# EAGLE board shematic (EAGLE 6.4)
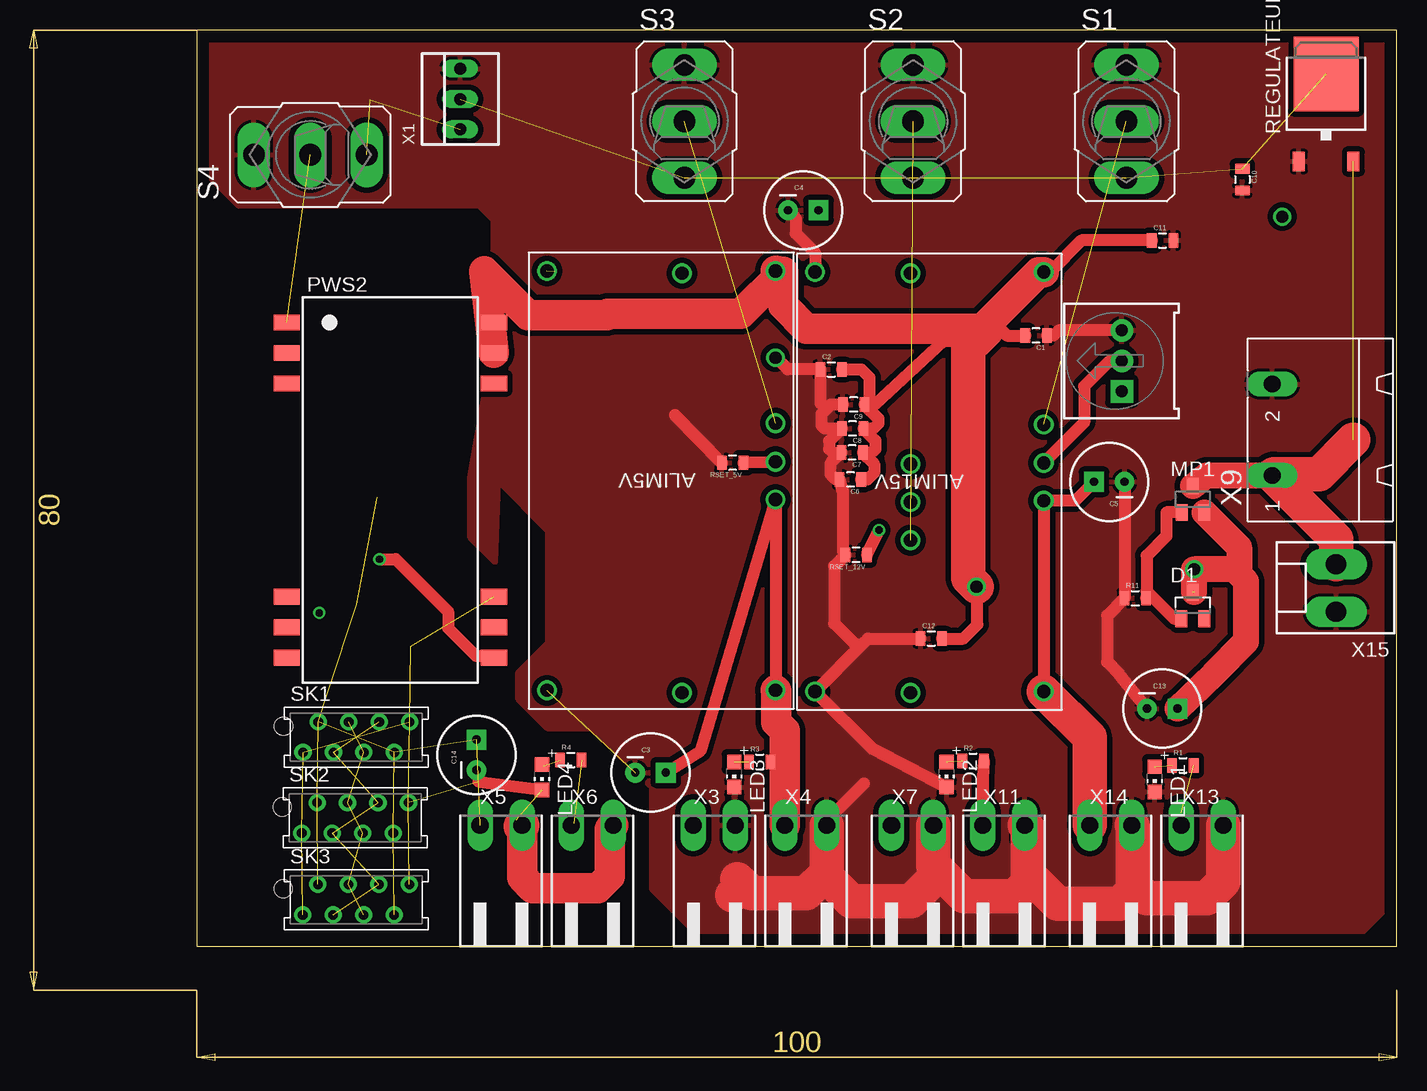
[diagram p0: board, top side]
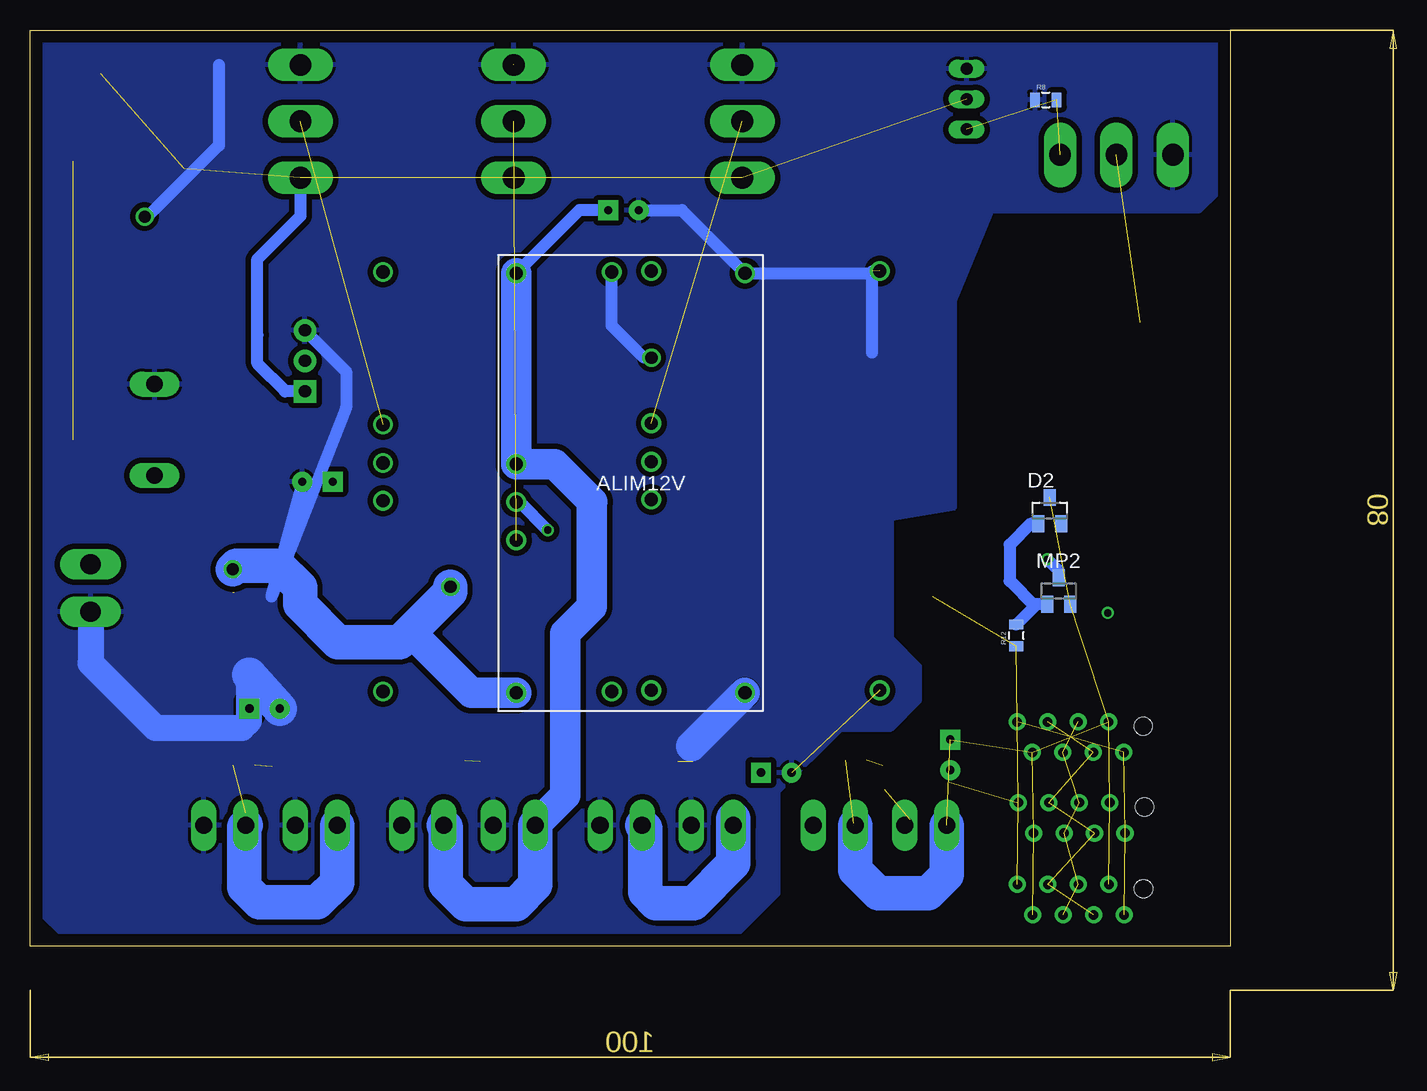
[diagram p1: board, bottom side, seen from below]

Size 100 x 76.35 mm. Coordinates in mm from the lower left corner, seen from the top.
Outline: 0,0 100,0 100,76.35 0,76.35 0,0
Copper layers (1*16): Top 0.035mm / dielectric 1.5mm / Bottom 0.035mm
Design rules "default *": minimum track width 10mil, minimum drill 24mil, track to track 0.45mm, track to pad 0.45mm, pad to pad 0.45mm, via to via 0.45mm, smd to smd 0.45mm, copper to edge 40mil, drill to drill 8mil, minimum pad ring 10mil, minimum via ring 8mil, stop-mask expansion 4mil, vias tented up to drill 0mil, thermal gap 10mil
Net classes: 0 default: width 1.016 mm, drill 0.6 mm, clearance 0.3 mm; 1 puissance: width 2.86 mm, drill 0.6 mm, clearance 2.86 mm to class 0, clearance 0.073 mm

## Footprints (pad centres in the part's own frame; a part is rotated, then mirrored left to right if it is on the bottom)
EUK7 = smd 1.016 x 1.016: 1 9.525,-17.475; 2 -9.525,-17.475; 3 -9.525,-4.775; 4 -9.525,-1.575; 5 -9.525,1.575; 6 -9.525,17.475; 7 9.525,17.475 | drill 1.1: P$1 -9.525,-17.475; P$2 -9.525,-4.775; P$3 -9.525,-1.575; P$4 -9.525,1.575; P$5 -9.525,17.475; P$6 9.525,17.475; P$7 9.525,-17.475
0805 = smd 0.8 x 1.2: 1 -0.9,0; 2 0.9,0
CPOL-RADIAL-100UF-25V = drill 0.7 pad 1.651 square: 1 1.27,0 | drill 0.7 pad 1.651: 2 -1.27,0
SOT23 = smd 1 x 1.4: 1 -0.95,-1.1; 2 0.95,-1.1; 3 0,1.1
CHIP-LED0805 = smd 1.2 x 1.2: A 0,-1.05; C 0,1.05
3386U = drill 1.016 pad 1.88 square: 1 -2.54,-0.015 | drill 1.016 pad 1.88: 2 0,-0.015; 3 2.54,-0.015
TES3 = smd 1.3 x 2.2: 1 -13.97,-8.636; 2 -11.43,-8.636; 3 -8.89,-8.636; 10 8.89,-8.636; 11 11.43,-8.636; 12 13.97,-8.636; 13 13.97,8.636; 14 11.43,8.636; 15 8.89,8.636; 22 -8.89,8.636; 23 -11.43,8.636; 24 -13.97,8.636
DPACK = smd 1 x 1.6: 1 -2.28,-4.8; 3 2.28,-4.8 | smd 5.4 x 6.2: 2 0,2.5
M9040P = drill 1.803 long: 1 0,4.699; 2 0,0; 3 0,-4.699
AMP-215079-8 = drill 0.8 pad 1.422: 1 0,-1.27; 2 1.27,1.27; 3 2.54,-1.27; 4 3.81,1.27; 5 5.08,-1.27; 6 6.35,1.27; 7 7.62,-1.27; 8 8.89,1.27 | hole 1.5: -1.62,0.905
22-23-2031 = drill 1 long: 1 -2.54,0; 2 0,0; 3 2.54,0
90-2 = drill 1.422 long: 1 -1.75,5.25; 2 1.75,5.25
GMSTBA2 = drill 1.397 long: 1 -3.81,5.08; 2 3.81,5.08
KK-156-2 = drill 1.7 pad 2.184 long: 1 -1.98,0; 2 1.98,0

## Placement (x,y rotation side)
ALIM5V  PTN78020WAH  [EUK7]  38.7,38.8 180 top
ALIM12V  PTN78020WAH  [EUK7]  49.95,38.6 0 bottom
ALIM15V  PTN78020HAH  [EUK7]  61.05,38.7 180 top
C1  2.2uF  [0805]  69.94,50.89 180 top
C2  2.2uF  [0805]  52.87,48.06 0 top
C3  330uF  [CPOL-RADIAL-100UF-25V]  37.81,14.46 0 top
C4  330uF  [CPOL-RADIAL-100UF-25V]  50.54,61.33 0 top
C5  330uF  [CPOL-RADIAL-100UF-25V]  76.04,38.7 180 top
C6  4.7uF  [0805]  54.47,38.89 180 top
C7  4.7uF  [0805]  54.61,41.14 180 top
C8  4.7uF  [0805]  54.65,43.14 180 top
C9  4.7uF  [0805]  54.74,45.14 180 top
C10  0.1uF  [0805]  87.13,63.89 270 top
C11  0.33uF  [0805]  80.48,58.81 0 top
C12  2.2uF  [0805]  61.21,25.64 0 top
C13  [CPOL-RADIAL-100UF-25V]  80.45,19.8 0 top
C14  [CPOL-RADIAL-100UF-25V]  23.31,15.94 90 top
D1  [SOT23]  83,28.4 0 top
D2  [SOT23]  15.02,36.3 0 bottom
LED1  [CHIP-LED0805]  79.83,13.9 180 top
LED2  [CHIP-LED0805]  62.48,14.3 180 top
LED3  [CHIP-LED0805]  44.79,14.3 180 top
LED4  [CHIP-LED0805]  28.77,14.08 180 top
MAX=100K  Rset_15v  [3386U]  77.07,48.78 90 top
MP1  [SOT23]  83.01,37.25 0 top
MP2  [SOT23]  14.28,29.6 0 bottom
PWS2  TES3-1222  [TES3]  16.13,38.01 270 top
R1  2k  [0805]  82.17,15.06 0 top
R2  2k  [0805]  64.69,15.44 0 top
R3  820  [0805]  46.91,15.37 0 top
R4  820  [0805]  31.17,15.51 0 top
R8  1k  [0805]  15.35,70.52 0 bottom
R11  100k  [0805]  78.2,29 0 top
R12  100k  [0805]  17.82,25.9 90 bottom
REGULATEUR_5V  MC33269D-5.0  [DPACK]  94.11,70.2 0 top
RSET_5V  21k  [0805]  44.65,40.29 180 top
RSET_12V  734  [0805]  54.94,32.61 180 top
S1  [M9040P]  77.47,68.74 0 top
S2  [M9040P]  59.69,68.74 0 top
S3  [M9040P]  40.64,68.74 0 top
S4  [M9040P]  9.46,65.95 90 top
SK1  [AMP-215079-8]  8.85,17.43 0 top
SK2  [AMP-215079-8]  8.75,10.7 0 top
SK3  [AMP-215079-8]  8.82,3.88 0 top
X1  22-23-2031  [22-23-2031]  21.95,70.6 90 top
X3  OUT1_5v  [90-2]  43.13,4.83 0 top
X4  OUT2_5v  [90-2]  50.75,4.83 0 top
X5  OUT1_T5V  [90-2]  25.35,4.83 0 top
X6  OUT2_T5v  [90-2]  32.97,4.83 0 top
X7  OUT1_12v  [90-2]  59.64,4.83 0 top
X9  IN_batteries  [GMSTBA2]  94.7,43.04 90 top
X11  OUT2_12v  [90-2]  67.26,4.83 0 top
X13  OUT2_15v  [90-2]  83.77,4.83 0 top
X14  OUT1_15v  [90-2]  76.15,4.83 0 top
X15  prise_Voltmetre  [KK-156-2]  94.95,29.85 90 top

## Library data of the parts
ALIM5V ALIM12V ALIM15V = ptn78020_
C1 C2 C6-C14 R11 R12 RSET_5V RSET_12V = SparkFun-Passives
C3-C5 = SparkFun-Capacitors
D1 D2 = diode
LED1-LED4 = adafruit
MAX=100K = SparkFun-Electromechanical
MP1 MP2 = sym
PWS2 = traco-electronic
R1-R4 R8 = SparkFun-Resistors
REGULATEUR_5V = linear
S1-S4 = switch
SK1-SK3 = jt-con-micromatch
X1 = con-molex; MF: MOLEX; MPN: 22-23-2031; OC_FARNELL: 1462950; OC_NEWARK: 30C0862
X3-X7 X11 X13 X14 = con-weidmueller-sl35; OC_FARNELL: unknown; OC_NEWARK: unknown
X9 = con-phoenix-762; MF: FARNELL; MPN: 1757242; OC_FARNELL: 3705171; OC_NEWARK: 71C4161
X15 = con-molex; OC_FARNELL: unknown; OC_NEWARK: unknown

## Nets
ADJUST_5V: ALIM5V.4 RSET_5V.1
ADJUST_12V: ALIM12V.4 RSET_12V.1
ADJUST_15V: ALIM15V.4 MAX=100K.2
BAT: MP1.3 REGULATEUR_5V.3 X9.1 X15.2
CANH: SK1.4 SK1.5 SK2.4 SK2.5 SK3.4 SK3.5
CANL: SK1.3 SK1.6 SK2.3 SK2.6 SK3.3 SK3.6
GND: ALIM5V.1 ALIM5V.7 ALIM12V.1 ALIM12V.7 ALIM15V.1 ALIM15V.7 C1.1 C2.1 C3.2 C4.2 C5.2 C6.2 C7.2 C8.2 C9.2 C10.2 C11.2 C12.1 C13.2 LED1.C LED2.C LED3.C MAX=100K.3 R8.1 R11.1 REGULATEUR_5V.1 RSET_5V.2 RSET_12V.2 S1.1 S2.1 S3.1 S4.1 X1.3 X3.2 X4.2 X7.2 X9.2 X11.2 X13.2 X14.2 X15.1
GND_T: C14.2 LED4.C PWS2.15 R12.1 SK1.1 SK1.8 SK2.1 SK2.8 SK3.1 SK3.8 X5.2 X6.2
GRILLE: D1.1 MP1.1 R11.2
GRILLE_CAN: D2.1 MP2.1 R12.2
N$2: LED1.A R1.1
N$3: LED2.A R2.1
N$4: LED3.A R3.1
N$5: LED4.A R4.1
N$6: PWS2.24
N$9: PWS2.2
N$10: PWS2.10
N$12: PWS2.12
OUT_5V: ALIM5V.5 ALIM5V.6 C3.1 R3.2 X3.1 X4.1
OUT_12V: ALIM12V.5 ALIM12V.6 C4.1 R2.2 X7.1 X11.1
OUT_15V: ALIM15V.5 ALIM15V.6 C5.1 R1.2 X13.1 X14.1
OUT_INTERR_1: ALIM15V.3 S1.2
OUT_INTERR_2: ALIM12V.3 S2.2
OUT_INTERR_3: ALIM5V.3 S3.2
OUT_INTERR_4: PWS2.1 S4.2
OUT_MASTER_INTERR: R8.2 S4.3 X1.1
OUT_REG: C10.1 MAX=100K.1 REGULATEUR_5V.2 S1.3 S2.3 S3.3 X1.2
OUT_T5V: MP2.3 PWS2.13
OUT_T5V_PROTEGE: C14.1 D2.3 MP2.2 R4.2 SK1.2 SK1.7 SK2.2 SK2.7 SK3.2 SK3.7 X5.1 X6.1
VBAT: ALIM5V.2 ALIM12V.2 ALIM15V.2 C1.2 C2.2 C6.1 C7.1 C8.1 C9.1 C11.1 C12.2 C13.1 D1.3 MP1.2 PWS2.23

## Tracks (layer width: path | path; a pad name or v marks a point on that pad's centre or on a via)
ADJUST_5V
  Top 1.016: RSET_5V.1 45.69,40.33 ALIM5V.4
ADJUST_12V  (via drill 0.6)
  Top 1.016: RSET_12V.1 v56.85,34.68
  Bottom 0.406: 59.2,37.02 ALIM12V.4
  Bottom 1.016: v56.85,34.68 59.2,37.02
ADJUST_15V
  Top 1.016: MAX=100K.2 76.08,48.78 73.95,46.65 73.95,43.65 ALIM15V.4
BAT  (1 unrouted)
  Top 2.184: MP1.3 84.14,39.23 X9.1
  Top 2.86: X15.2 94.95,33.9 X9.1 89.74,39.35 93.55,39.35 96.39,42.19
CANH  (5 unrouted)
CANL  (5 unrouted)
GND  (via drill 1)  (3 unrouted)
  Top 1.016: 61.55,9.71 61.39,9.55 | C13.2 76.83,22.72 75.85,23.7 75.85,27.55 R11.1 C5.2 | C9.2 52.84,45.14 52.45,44.75 | 52.45,44.75 52.05,44.35 52.05,43.4 52.3,43.15 C8.2 52.7,42.09 52.7,41.45 53.01,41.14 C7.2 52.8,40.23 52.8,39.35 53.26,38.89 C6.2 53.84,37.96 53.84,32.86 RSET_12V.2 53.1,31.67 53.1,26.9 54.85,25.15 55.45,25.15 | 55.59,13.54 52.5,10.45 X4.2 | 55.45,25.15 ALIM15V.7 56.31,16.44 LED2.C | 55.45,25.15 55.94,25.64 C12.1 | RSET_5V.2 39.85,44.26 | MAX=100K.3 71.82,51.32 71.4,50.9 C1.1 | C4.2 49.9,60.7 49.9,59.4 51.52,57.77 ALIM15V.1 | 52.45,44.75 51.97,45.23 C2.1 49.24,48.06 v48.25,49.05
  Top 2.86: 45.05,5.6 45.5,5.15 | 45.5,5.15 46.25,4.4 50.8,4.4 52.5,6.1 X4.2 52.5,5.8 54.55,3.75 59.55,3.75 61.95,6.15 | X11.2 69.25,9.84 69.25,6.05 | 69.25,6.05 69.25,5.25 68.15,4.15 63.95,4.15 61.95,6.15 | 61.95,6.15 61.39,6.71 61.39,9.55 X7.2 | X14.2 78,9.98 78,5.15 78.25,4.9 | 78.25,4.9 79.15,4 84.15,4 85.52,5.37 X13.2 | 44.6,4.25 45.5,5.15 | 69.25,6.05 71.75,3.55 76.9,3.55 78.25,4.9
  Bottom 1.016: 59.71,73.44 59.75,73.4 | C4.2 45.68,61.33 ALIM12V.7 29.82,56.08 | MAX=100K.3 73.65,47.88 73.65,44.9 79.88,29.15 77.2,38.81 C5.2 | v48.25,49.05 48.85,49.05 51.52,51.73 ALIM15V.1 | 84.26,73.44 84.26,66.74 90.35,60.65 | 29.82,56.08 29.82,56.23 | 29.82,49.5 29.82,56.08
  Bottom 2.18: 81.75,18.8 81.75,22.63
  Bottom 2.184: X15.1 94.95,23.6 89.55,18.2 82.35,18.2 81.75,18.8
  Bottom 2.56: ALIM12V.1 44.88,16.67
  Bottom 2.86: 81.75,22.63 C13.2
  pour Bottom (isolate 0.254): 1,75.4 1.65,76.05 99.1,76.05 99.1,2.75 97.25,0.9 41.15,0.9 37.65,4.4 37.65,12.9 32.45,18.1 28.25,18.1 25.85,20.5 25.85,23.3 28.2,25.65 28.2,35.65 22.95,36.55 22.95,53.85 19.85,61.3 2.55,61.3 1,62.85
  pour Top (isolate 0.305): 0.25,76.15 0.35,76.05 99.55,76.05 99.15,75.65 99.15,3.15 96.75,0.75 41.9,0.75 37.9,4.75 37.9,13.2 33,18.1 29.25,18.1 26.75,20.6 26.75,22.8 29.25,25.3 29.25,34.6 25.1,38.75 24.85,31.95 22.75,34.05 22.75,39.05 24.7,50.25 24.7,60.5 23.55,61.65 3.5,61.65 0.25,64.9
GND_T  (9 unrouted)
  Top 1.016: 26.63,10.55 X5.2 | 26.6,10.58 X5.2 | C14.2 23.48,13.72 LED4.C | 26.68,10.5 X5.2
  Top 2.54: X5.2 27.1,5.75 28,4.85 33.4,4.85 34.4,5.85 34.4,9.76 X6.2
  Top 2.86: X5.2 27,9.98
GRILLE
  Top 1.016: 79.55,29.2 79.3,29.2 R11.2 | MP1.1 80.8,36.15 80.8,34.2 79.15,32.55 79.15,29.6 79.55,29.2 | 79.55,29.2 81.45,27.3 D1.1
GRILLE_CAN
  Bottom 1.016: MP2.1 16.11,28.5 16.27,28.35 | 16.27,28.35 R12.2 | D2.1 16.65,35.2 18.38,33.48 18.38,30.45 16.27,28.35
N$2  (1 unrouted)
N$3  (1 unrouted)
N$4  (1 unrouted)
N$5  (1 unrouted)
  Top 1.016: 28.92,15.04 LED4.A
N$7  (via drill 1)
  other vias: 64.95,29.95
N$8  (via drill 0.6)
  other vias: 10.2,27.78
N$16  (via drill 1)
  other vias: 48.2,49.05
N$19  (via drill 1)
  other vias: 90.45,60.8
OUT_5V
  Top 0.5: R3.2 48.54,15.05 49,16.9
  Top 1.016: ALIM5V.6 ALIM5V.5 41.98,16.3 C3.1
  Top 2.56: ALIM5V.6 48.27,21.28 48.27,18.68 49,17.95 49,16.9 X4.1
  Bottom 2.86: X4.1 48.75,9.83 48.75,4.5 47.85,3.6 44.7,3.6 41.38,6.92 X3.1 41.38,10.62
OUT_12V
  Top 1.016: 65.45,10.14 X11.1 65.51,14.02 R2.2
  Bottom 1.016: C4.1 54.22,61.33 ALIM12V.6
  Bottom 2.56: X7.1 55.4,12.57 55.4,26.1 53.2,28.3 53.2,37 53.15,37.05 56.27,40.18 ALIM12V.5 ALIM12V.6
  Bottom 2.86: X11.1 65.35,9.92 65.35,5.15 63.7,3.5 59.5,3.5 57.89,5.11 X7.1
OUT_15V  (1 unrouted)
  Top 1.016: 82.02,11.12 X13.1 | C5.1 73.19,37.12 ALIM15V.5 ALIM15V.6
  Top 2.86: ALIM15V.6 74.4,17.4 X14.1
  Bottom 2.86: X13.1 82.15,9.95 82.15,4.9 80.9,3.65 76.05,3.65 74.4,5.3 X14.1
OUT_INTERR_1  (1 unrouted)
OUT_INTERR_2  (1 unrouted)
OUT_INTERR_3  (1 unrouted)
OUT_INTERR_4  (1 unrouted)
OUT_MASTER_INTERR  (2 unrouted)
OUT_REG  (5 unrouted)
  Bottom 1.016: S1.3 77.47,60.83 81.1,57.2 81.1,51 81.05,50.95 81.05,48.55 78.74,46.24 MAX=100K.1
OUT_T5V  (via drill 0.6)
  Top 1.016: PWS2.13 24.61,24.2 23.25,24.2 20.95,26.5 20.95,27.88 16.57,32.25 v15.22,32.25
  Bottom 1.016: 14.28,31.33 MP2.3 14.28,31.3 v15.22,32.25
OUT_T5V_PROTEGE  (10 unrouted)
  Top 1.016: 31.4,10.26 X6.1
  Bottom 2.86: X5.1 23.6,5.95 25.15,4.4 29.3,4.4 31.22,6.32 X6.1
VBAT  (via drill 1)  (1 unrouted)
  Top 1.016: 63.9,49.4 64.28,49.77 64.75,50.25 64.75,50.45 | C11.1 73.71,58.81 71.08,56.18 ALIM15V.2 | 56.52,45.17 C9.1 56.8,43.98 56.8,43.55 56.39,43.14 C8.1 56.55,42.14 56.55,41.45 56.24,41.14 C7.1 56.45,40.2 56.45,39.45 55.89,38.89 C6.1 | 56.52,45.17 62.25,50.45 64.75,50.45 | 64.75,50.45 64.95,50.45 | C12.2 63.89,25.64 65.05,26.8 65.05,29.9 v65,29.95 | C2.2 55.39,48.06 56.05,47.4 56.05,45.64 56.52,45.17 | 65.78,51.27 65.78,51.45 65.78,51.77 65.83,51.83 66.2,52.2 67.51,50.89 C1.2
  Top 2.18: 86.45,31.4 v83.1,31.4 83.1,29.5 | MP1.2 86.85,33.26 86.85,31
  Top 2.184: C13.1 84.77,22.72 87.45,25.4 87.45,30.4 86.85,31 86.45,31.4
  Top 2.56: ALIM5V.2 48.85,56.2 | 48.85,56.2 48.85,53.4 50.8,51.45 65.78,51.45 | 48.85,56.2 45.35,52.7 34.25,52.7 34.15,52.6 27.6,52.6 23.96,56.24 PWS2.23 | ALIM15V.2 70.17,56.18 65.83,51.83
  Top 2.86: 65.78,51.27 64.95,50.45 | v65,29.95 64.28,30.68 64.28,49.77
  Bottom 2.56: ALIM12V.2 63.23,21.12 68.33,26.23
  Bottom 2.86: v83.1,31.4 82.8,31.7 79.3,31.7 77.5,29.9 77.5,28.5 74.35,25.35 69.2,25.35 68.33,26.23 65,29.55 v65,29.95